# EAGLE board Gr3_interface (EAGLE 9.6.2)
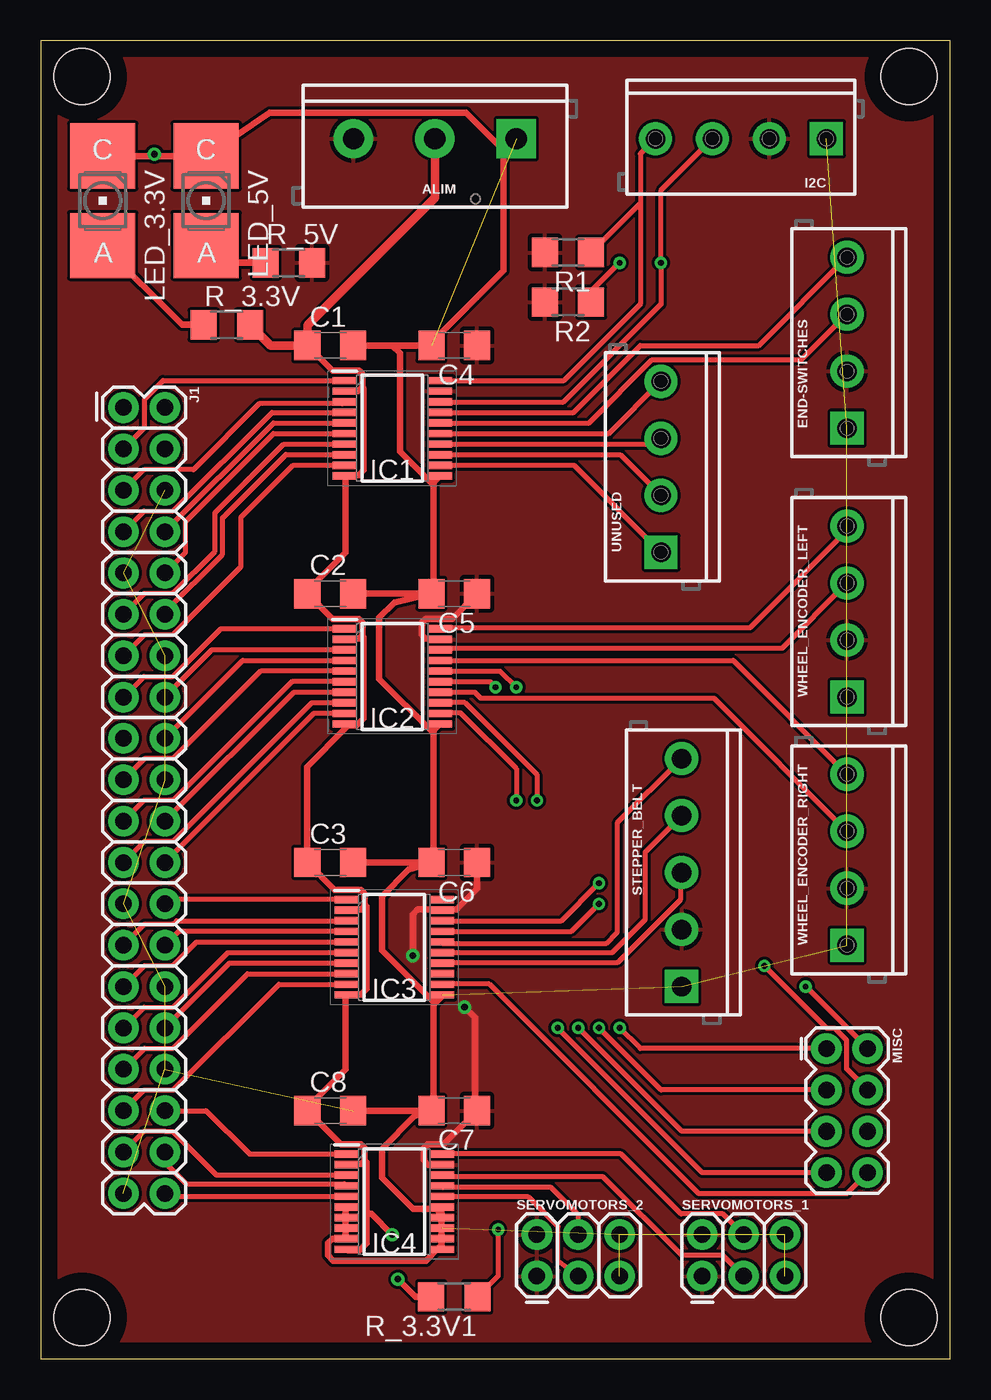
[diagram p0: board, top side]
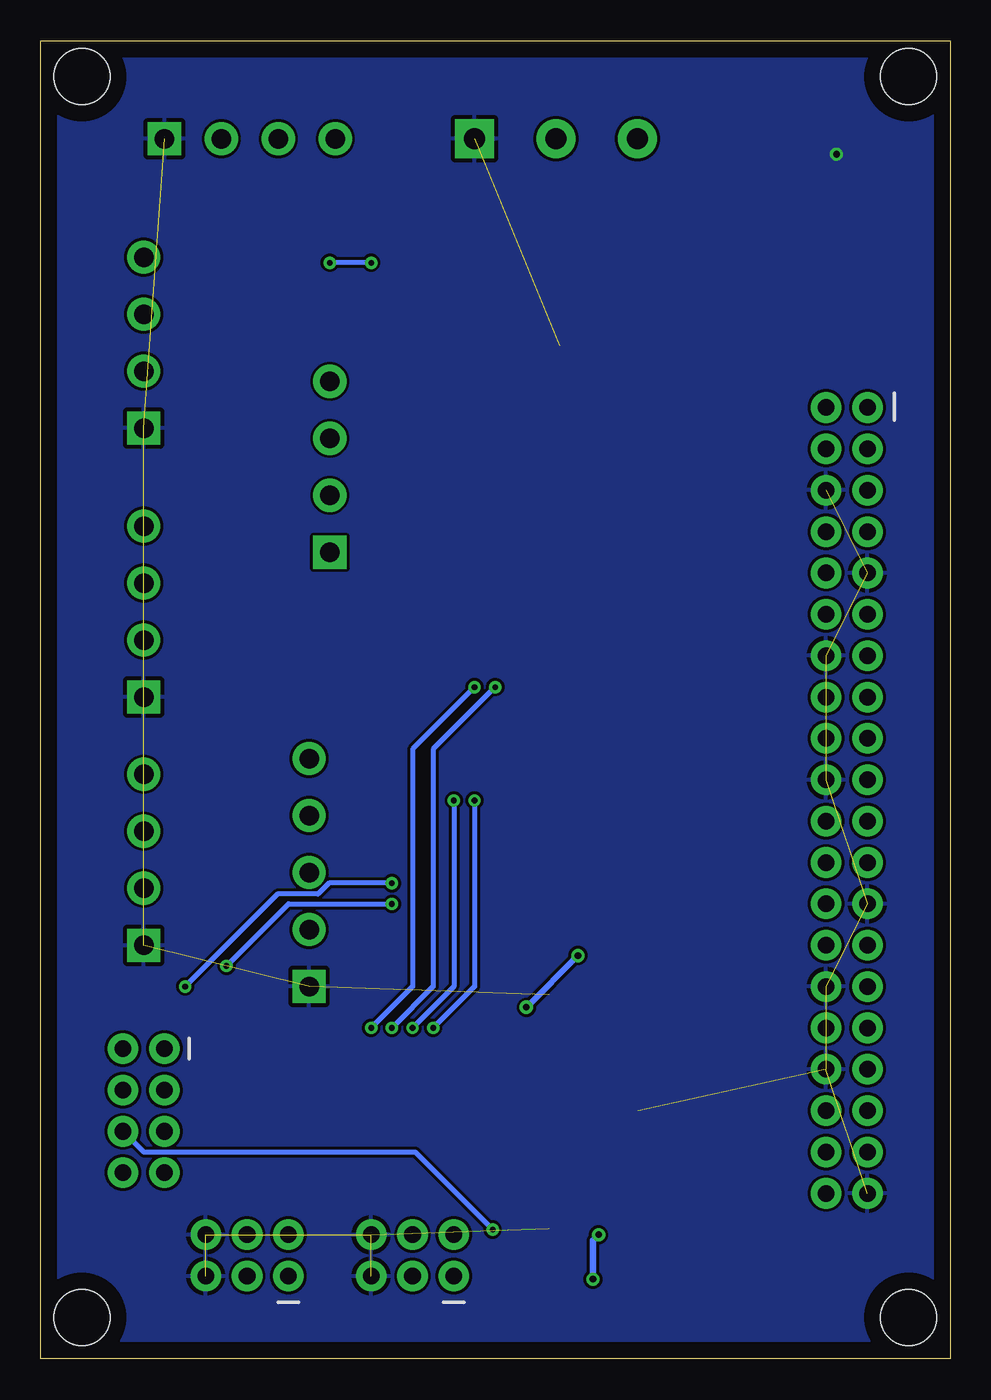
[diagram p1: board, bottom side, seen from below]

Size 55.86 x 80.95 mm. Coordinates in mm from the lower left corner, seen from the top.
Outline: 0,0 55.86,0 55.86,80.95 0,80.95 0,0
Copper layers (1*16): Top 0.035mm / dielectric 1.5mm / Bottom 0.035mm
Design rules "default": minimum track width 6mil, minimum drill 0.35mm, track to track 6mil, track to pad 6mil, pad to pad 6mil, via to via 6mil, smd to smd 6mil, copper to edge 40mil, drill to drill 6mil, minimum pad ring 10mil, minimum via ring 8mil, stop-mask expansion 4mil, vias tented up to drill 0mil, thermal gap 10mil
Net classes: 0 default: width 0.305 mm, drill 0.305 mm, clearance 0.152 mm; 1 Power: width 0.406 mm, drill 0.406 mm, clearance 0.178 mm
Holes 3.43 mm at 53.34,78.74 2.54,78.74 2.54,2.54 53.34,2.54

## Footprints (pad centres in the part's own frame; a part is rotated, then mirrored left to right if it is on the bottom)
SCREWTERMINAL-5MM-3 = drill 1.3 pad 2.413 square: 1 0,0 | drill 1.3 pad 2.413: 2 5,0; 3 10,0
C1206 = smd 1.6 x 1.8: 1 -1.4,0; 2 1.4,0
SCREWTERMINAL-3.5MM-4 = drill 1.2 pad 2.032 square: 1 0,0 | drill 1.2 pad 2.032: 2 3.5,0; 3 7,0; 4 10.5,0
SOP65P640X120-20N = smd 1.475 x 0.45: 1 -2.938,2.925; 2 -2.938,2.275; 3 -2.938,1.625; 4 -2.938,0.975; 5 -2.938,0.325; 6 -2.938,-0.325; 7 -2.938,-0.975; 8 -2.938,-1.625; 9 -2.938,-2.275; 10 -2.938,-2.925; 11 2.938,-2.925; 12 2.938,-2.275; 13 2.938,-1.625; 14 2.938,-0.975; 15 2.938,-0.325; 16 2.938,0.325; 17 2.938,0.975; 18 2.938,1.625; 19 2.938,2.275; 20 2.938,2.925
2X20 = drill 1.016 pad 1.88: 1 0,0; 2 0,2.54; 3 2.54,0; 4 2.54,2.54; 5 5.08,0; 6 5.08,2.54; 7 7.62,0; 8 7.62,2.54; 9 10.16,0; 10 10.16,2.54; 11 12.7,0; 12 12.7,2.54; 13 15.24,0; 14 15.24,2.54; 15 17.78,0; 16 17.78,2.54; 17 20.32,0; 18 20.32,2.54; 19 22.86,0; 20 22.86,2.54; 21 25.4,0; 22 25.4,2.54; 23 27.94,0; 24 27.94,2.54; 25 30.48,0; 26 30.48,2.54; 27 33.02,0; 28 33.02,2.54; 29 35.56,0; 30 35.56,2.54; 31 38.1,0; 32 38.1,2.54; 33 40.64,0; 34 40.64,2.54; 35 43.18,0; 36 43.18,2.54; 37 45.72,0; 38 45.72,2.54; 39 48.26,0; 40 48.26,2.54
P-LCC-2 = smd 4 x 4: A 0,2.75; C 0,-2.75
2X4 = drill 1.016 pad 1.88: 1 -3.81,-1.27; 2 -3.81,1.27; 3 -1.27,-1.27; 4 -1.27,1.27; 5 1.27,-1.27; 6 1.27,1.27; 7 3.81,-1.27; 8 3.81,1.27
R1206 = smd 1.6 x 1.803: 1 -1.422,0; 2 1.422,0
2X3 = drill 1.016 pad 1.88: 1 0,0; 2 0,2.54; 3 2.54,0; 4 2.54,2.54; 5 5.08,0; 6 5.08,2.54
SCREWTERMINAL-3.5MM-5 = drill 1.2 pad 2.032 square: 1 0,0 | drill 1.2 pad 2.032: 2 3.5,0; 3 7,0; 4 10.5,0; 5 14,0

## Placement (x,y rotation side)
ALIM  [SCREWTERMINAL-5MM-3]  29.21,74.93 180 top
C1  0.1uF  [C1206]  17.78,62.23 0 top
C2  0.1uF  [C1206]  17.78,46.99 0 top
C3  0.1uF  [C1206]  17.78,30.48 0 top
C4  0.1uF  [C1206]  25.4,62.23 180 top
C5  0.1uF  [C1206]  25.4,46.99 180 top
C6  0.1uF  [C1206]  25.4,30.48 180 top
C7  0.1uF  [C1206]  25.4,15.24 180 top
C8  0.1uF  [C1206]  17.78,15.24 0 top
END-SWITCHES  [SCREWTERMINAL-3.5MM-4]  49.53,57.15 90 top
I2C  [SCREWTERMINAL-3.5MM-4]  48.26,74.93 180 top
IC1  TXS0108EPWR  [SOP65P640X120-20N]  21.59,57.15 0 top
IC2  TXS0108EPWR  [SOP65P640X120-20N]  21.59,41.91 0 top
IC3  TXS0108EPWR  [SOP65P640X120-20N]  21.72,25.27 0 top
IC4  TXS0108EPWR  [SOP65P640X120-20N]  21.72,9.65 0 top
J1  RASPBERRYPI-40-PIN-GPIO_PTH_NO_SHROUD  [2X20]  5.08,58.42 270 top
LED_3.3V  GREEN  [P-LCC-2]  3.81,71.12 180 top
LED_5V  GREEN  [P-LCC-2]  10.16,71.12 180 top
MISC  [2X4]  49.53,15.24 270 top
R1  10k  [R1206]  32.38,67.94 180 top
R2  10k  [R1206]  32.38,64.9 180 top
R_3.3V  1k  [R1206]  11.43,63.5 0 top
R_3.3V1  1k  [R1206]  25.4,3.81 180 top
R_5V  1k  [R1206]  15.24,67.31 0 top
SERVOMOTORS_1  [2X3]  40.64,5.08 0 top
SERVOMOTORS_2  [2X3]  30.48,5.08 0 top
STEPPER_BELT  [SCREWTERMINAL-3.5MM-5]  39.37,22.86 90 top
UNUSED  [SCREWTERMINAL-3.5MM-4]  38.1,49.53 90 top
WHEEL_ENCODER_LEFT  [SCREWTERMINAL-3.5MM-4]  49.53,40.64 90 top
WHEEL_ENCODER_RIGHT  [SCREWTERMINAL-3.5MM-4]  49.53,25.4 90 top

## Library data of the parts
ALIM = SparkFun-Connectors; PROD_ID: CONN-10134; SF_SKU: PRT-08433
C1-C8 LED_3.3V LED_5V R1 R2 R_3.3V R_3.3V1 R_5V = adafruit
END-SWITCHES I2C UNUSED WHEEL_ENCODER_LEFT WHEEL_ENCODER_RIGHT = SparkFun-Connectors; PROD_ID: 2xCONN-08399; SF_ID: 2xPRT-08084
IC1-IC4 = TXS0108EPWR; ARROW_PART_NUMBER: TXS0108EPWR; ARROW_PRICE-STOCK: https://www.arrow.com/en/products/txs0108epwr/texas-instruments; DESCRIPTION: TXS0108EPWR, Voltage Level Translator, Open Drain 1.2 3.6 V, 1.65 5.5 V 20-Pin TSSOP; HEIGHT: 1.2mm; MANUFACTURER_NAME: Texas Instruments; MANUFACTURER_PART_NUMBER: TXS0108EPWR; MOUSER_PART_NUMBER: 595-TXS0108EPWR; MOUSER_PRICE-STOCK: https://www.mouser.co.uk/ProductDetail/Texas-Instruments/TXS0108EPWR?qs=IUbkBnfnSQLgiWtCbWtYOw%3D%3D
J1 MISC = SparkFun-Connectors
SERVOMOTORS_1 SERVOMOTORS_2 = SparkFun-Connectors; PROD_ID: CONN-09701
STEPPER_BELT = SparkFun-Connectors; PROD_ID: Combine 8288+8399

## Nets
1: J1.1
2: J1.2
3.3V [Power]: ALIM.2 C1.1 C2.1 C3.1 C8.1 IC1.2 IC1.10 IC2.2 IC2.10 IC3.2 IC3.10 IC4.2 IC4.10 R_3.3V1.2 R_3.3V.2
4: J1.4
5V [Power]: ALIM.3 C4.1 C5.1 C6.1 C7.1 END-SWITCHES.2 I2C.2 IC1.19 IC2.19 IC3.19 IC4.19 R1.2 R2.2 R_5V.2 SERVOMOTORS_1.1 SERVOMOTORS_1.2 SERVOMOTORS_2.1 SERVOMOTORS_2.2 STEPPER_BELT.2 WHEEL_ENCODER_LEFT.2 WHEEL_ENCODER_RIGHT.2
17: J1.17
BELT_DIR: IC3.14 STEPPER_BELT.3
BELT_ENABLE: IC3.16 STEPPER_BELT.5
BELT_STEP: IC3.15 STEPPER_BELT.4
CE0: IC2.9 J1.24
CE0-5V: IC2.12 MISC.7
CE1: IC3.1 J1.26
CE1-5V: IC3.20
END-SWITCH_1: END-SWITCHES.4 IC1.17
END-SWITCH_2: END-SWITCHES.3 IC1.16
GND [Power]: ALIM.1 C1.2 C2.2 C3.2 C4.2 C5.2 C6.2 C7.2 C8.2 END-SWITCHES.1 I2C.1 IC1.11 IC2.11 IC3.11 IC4.6 IC4.7 IC4.8 IC4.9 IC4.11 IC4.12 IC4.13 IC4.14 IC4.15 J1.6 J1.9 J1.14 J1.20 J1.25 J1.30 J1.34 J1.39 LED_3.3V.C LED_5V.C SERVOMOTORS_1.5 SERVOMOTORS_1.6 SERVOMOTORS_2.5 SERVOMOTORS_2.6 STEPPER_BELT.1 WHEEL_ENCODER_LEFT.1 WHEEL_ENCODER_RIGHT.1
GP4: IC1.4 J1.7
GP5: IC3.5 J1.29
GP6: IC3.6 J1.31
GP12: IC3.7 J1.32
GP13: IC3.8 J1.33
GP16: IC4.1 J1.36
GP17: IC1.7 J1.11
GP18: IC1.8 J1.12
GP19: IC3.9 J1.35
GP20: IC4.4 J1.38
GP21: IC4.5 J1.40
GP22: IC2.1 J1.15
GP23: IC2.3 J1.16
GP24: IC2.4 J1.18
GP25: IC2.7 J1.22
GP26: IC4.3 J1.37
GP27: IC1.9 J1.13
ID_SC: IC3.4 J1.28
ID_SC-5V: IC3.17 MISC.4
ID_SD: IC3.3 J1.27
ID_SD-5V: IC3.18 MISC.2
INFRARED_SENSING: IC3.12 MISC.8
INFRARED_SUPPLY: MISC.6 R_3.3V1.1
MISO: IC2.6 J1.21
MISO-5V: IC2.15 MISC.3
MOSI: IC2.5 J1.19
MOSI-5V: IC2.16 MISC.1
N$1: IC3.13
N$5: LED_3.3V.A R_3.3V.1
N$6: LED_5V.A R_5V.1
RXI: IC1.6 J1.10
SCL: IC1.3 J1.5
SCL-5V: I2C.3 IC1.18 R2.1
SCLK: IC2.8 J1.23
SCLK-5V: IC2.13 MISC.5
SDA: IC1.1 J1.3
SDA-5V: I2C.4 IC1.20 R1.1
SERVO_BACK: IC4.20 SERVOMOTORS_1.4
SERVO_CLAMP: IC4.17 SERVOMOTORS_2.4
SERVO_FLAG: IC4.16 SERVOMOTORS_2.3
SERVO_RACK: IC4.18 SERVOMOTORS_1.3
TXO: IC1.5 J1.8
UNUSED_1: IC1.15 UNUSED.4
UNUSED_2: IC1.14 UNUSED.3
UNUSED_3: IC1.13 UNUSED.2
UNUSED_4: IC1.12 UNUSED.1
W_LEFT_A: IC2.20 WHEEL_ENCODER_LEFT.4
W_LEFT_B: IC2.18 WHEEL_ENCODER_LEFT.3
W_RIGHT_A: IC2.17 WHEEL_ENCODER_RIGHT.4
W_RIGHT_B: IC2.14 WHEEL_ENCODER_RIGHT.3

## Tracks (layer width: path | path; a pad name or v marks a point on that pad's centre or on a via)
3.3V  (via drill 0.41)
  Top 0.406: 19.77,59.69 19.5,59.42 IC1.2 | 19.73,44.41 19.77,44.45 19.77,45.22 19.55,45.44 17.93,45.44 C2.1 16.35,47.15 18.73,49.53 18.73,54.13 | 19.73,44.41 19.55,44.23 18.7,44.23 IC2.2 | 19.9,27.82 19.9,28.58 19.67,28.8 18.06,28.8 C3.1 16.35,30.64 16.35,36.35 18.73,38.73 18.73,38.89 | 19.9,27.82 19.67,27.59 18.82,27.59 IC3.2 | 19.89,12.18 19.9,12.19 19.9,12.96 19.67,13.18 18.44,13.18 C8.1 16.35,15.4 18.73,17.78 18.73,22.23 IC3.10 18.89,22.38 19.67,22.38 20,22.72 20,27.78 19.9,27.82 | 19.89,12.18 19.67,11.97 18.82,11.97 IC4.2 | 19.77,59.69 19.77,60.46 19.55,60.68 17.93,60.68 C1.1 | 18.73,38.89 IC2.10 | 19.73,44.41 19.84,44.29 19.84,39.33 19.41,38.89 18.73,38.89 | 18.73,54.13 IC1.10 | 19.77,59.69 19.84,59.53 19.84,54.56 19.55,54.27 18.87,54.27 18.73,54.13 | 20,8.89 20,12.06 19.89,12.18 | IC4.10 18.89,6.67 19.57,6.67 20,7.1 20,8.89 | R_3.3V1.2 23.02,3.81 v21.94,4.89 | 20,8.89 20.32,8.89 v21.59,7.62
  Top 0.508: ALIM.2 24.21,71.31 16.38,63.48 C1.1 14.12,62.23 R_3.3V.2
  Bottom 0.406: v21.59,7.62 21.94,7.27 v21.94,4.89
5V  (via drill 0.41)
  Top 0.406: C5.1 25.25,45.44 23.63,45.44 23.41,45.22 23.41,44.45 23.63,44.23 24.48,44.23 IC2.19 | v22.86,24.77 22.86,27.3 23.15,27.59 24.61,27.59 IC3.19 24.7,27.59 25.55,27.59 26.8,28.84 C6.1 | v26.04,21.59 26.67,20.95 26.67,15.24 C7.1 24.74,13.18 23.76,13.18 23.54,12.96 23.54,12.19 23.8,11.93 IC4.19
  Bottom 0.406: v26.04,21.59 v22.86,24.77
  pour Top: -1.27,82.55 57.15,82.55 57.15,-1.27 -1.27,-1.27
BELT_DIR
  Top 0.305: IC3.14 24.69,24.35 35.45,24.35 39.32,28.21 39.32,29.83 STEPPER_BELT.3
BELT_ENABLE
  Top 0.305: IC3.16 24.69,25.49 34.71,25.49 35.41,26.19 35.41,32.89 39.32,36.8 STEPPER_BELT.5
BELT_STEP
  Top 0.305: IC3.15 35.11,24.95 37.13,26.98 37.13,31.12 STEPPER_BELT.4
CE0
  Top 0.305: IC2.9 16.77,39.63 J1.24
CE0-5V  (via drill 0.35)
  Top 0.305: MISC.7 40.64,11.43 v31.75,20.32 | v29.21,34.29 29.21,36.24 25.78,39.67 24.56,39.67 IC2.12
  Bottom 0.305: v31.75,20.32 29.21,22.86 v29.21,34.29
CE1
  Top 0.305: IC3.1 7.88,28.2 J1.26
END-SWITCH_1
  Top 0.305: IC1.17 32.73,58.12 36.83,62.23 44.11,62.23 END-SWITCHES.4
END-SWITCH_2
  Top 0.305: IC1.16 33.68,57.48 37.55,61.35 46.73,61.35 END-SWITCHES.3
GND  (via drill 0.41)  (18 unrouted)
  Top 0.406: LED_3.3V.C 6.99,73.87 | 6.99,73.87 LED_5V.C 14.07,76.52 26.14,76.52 28.42,74.24 28.42,66.83 23.97,62.39 C4.2 21.59,62.23 | 24.61,9.05 24.61,8.73 IC4.14 24.61,8.57 24.61,8.1 IC4.13 24.61,7.94 24.61,7.46 IC4.12 24.61,7.3 24.61,6.83 IC4.11 24.45,6.83 23.65,6.03 17.97,6.03 17.66,6.34 17.66,7.11 17.93,7.38 IC4.9 18.73,7.46 18.73,7.94 IC4.8 18.73,8.1 18.73,8.57 IC4.7 18.73,8.73 18.73,9.37 IC4.6 | 24.21,21.83 24.13,21.75 24.13,15.24 C7.2 | 24.21,21.83 24.61,22.23 IC3.11 | C7.2 C8.2 | C7.2 22.96,14.91 20.95,12.91 20.95,11.11 22.86,9.21 24.45,9.21 24.45,9.05 24.61,9.05 | 24.13,38.58 24.45,38.89 IC2.11 | 24.13,38.58 24.13,30.48 C6.2 | C6.2 C3.2 | v6.99,73.98 6.99,73.87 | 21.59,62.23 C1.2 | 24.13,53.82 24.45,54.13 IC1.11 | 24.13,53.82 24.13,46.99 C5.2 | C5.2 C2.2 | 24.13,53.82 23.97,53.82 22.07,55.72 22.07,61.75 21.59,62.23 | 24.13,38.58 23.97,38.58 20.8,41.75 20.8,45.52 21.72,46.45 C5.2 | 24.21,21.83 20.95,25.08 20.95,28.39 22.6,30.04 C6.2 | IC4.15 24.61,9.37 24.61,9.05
  pour Bottom: -2.54,83.82 58.42,83.82 58.42,-2.54 -2.54,-2.54
GP4
  Top 0.305: J1.7 6.35,52.07 8.15,52.07 14.2,58.12 IC1.4
GP5
  Top 0.305: J1.29 6.38,24.16 8.14,24.16 9.58,25.6 IC3.5
GP6
  Top 0.305: J1.31 6.35,21.59 8.15,21.59 11.5,24.95 IC3.6
GP12
  Top 0.305: J1.32 11.6,24.3 IC3.7
GP13
  Top 0.305: J1.33 6.38,19.07 8.14,19.07 12.71,23.65 IC3.8
GP16
  Top 0.305: J1.36 10.16,15.24 12.82,12.58 IC4.1
GP17
  Top 0.305: J1.11 6.38,47.02 8.14,47.02 10.71,49.59 10.71,51.96 14.92,56.17 IC1.7
GP18
  Top 0.305: J1.12 7.62,45.85 11.17,49.4 11.17,51.65 15.07,55.55 18.63,55.55 IC1.8
GP19
  Top 0.305: J1.35 6.35,16.51 8.15,16.51 14.63,23 IC3.9
GP20
  Top 0.305: IC4.4 18.66,10.75 8.93,10.75 7.62,12.05 J1.38
GP21
  Top 0.305: J1.40 7.8,9.98 IC4.5
GP22
  Top 0.305: J1.15 6.35,41.91 8.15,41.91 11.07,44.84 IC2.1
GP23
  Top 0.305: IC2.3 10.52,43.53 J1.16
GP24
  Top 0.305: J1.18 12.4,42.88 IC2.4
GP25
  Top 0.305: IC2.7 15.54,40.94 J1.22
GP26
  Top 0.305: IC4.3 10.8,11.28 8.14,13.95 7.64,13.95 7.62,13.97 6.35,13.97 J1.37
GP27
  Top 0.305: J1.13 6.38,44.48 8.14,44.48 12.31,48.65 12.31,51.68 15.51,54.88 IC1.9
ID_SC
  Top 0.305: IC3.4 8.47,26.25 J1.28
ID_SC-5V  (via drill 0.35)
  Top 0.305: IC3.17 32.6,26.25 v34.29,27.94 | MISC.4 49.51,17.8 49.51,19.57 48.78,20.3 48.28,20.3 v44.45,24.13
  Bottom 0.305: v44.45,24.13 40.64,27.94 v34.29,27.94
ID_SD
  Top 0.305: IC3.3 8.34,26.9 8.14,26.7 6.38,26.7 J1.27
ID_SD-5V  (via drill 0.35)
  Top 0.305: IC3.18 31.98,26.9 v34.29,29.21 | MISC.2 v46.99,22.86
  Bottom 0.305: v34.29,29.21 38.15,29.21 38.82,28.54 41.31,28.54 v46.99,22.86
INFRARED_SENSING
  Top 0.305: IC3.12 24.77,23.02 27.55,23.02 40.41,10.16 49.53,10.16 MISC.8
INFRARED_SUPPLY  (via drill 0.35)
  Top 0.305: v28.1,7.94 28.1,5.09 R_3.3V1.1
  Bottom 0.305: v28.1,7.94 32.86,12.7 49.53,12.7 MISC.6
MISO
  Top 0.305: J1.21 6.35,34.29 8.15,34.29 15.44,41.59 IC2.6
MISO-5V  (via drill 0.35)
  Top 0.305: IC2.15 27.6,41.59 v27.94,41.25 | MISC.3 38.1,16.51 v34.29,20.32
  Bottom 0.305: v27.94,41.25 31.75,37.44 31.75,22.86 v34.29,20.32
MOSI
  Top 0.305: J1.19 6.38,36.85 8.14,36.85 13.52,42.23 IC2.5
MOSI-5V  (via drill 0.35)
  Top 0.305: IC2.16 28.22,42.23 v29.21,41.25 | MISC.1 36.83,19.05 v35.56,20.32
  Bottom 0.305: v29.21,41.25 33.02,37.44 33.02,22.86 v35.56,20.32
N$5
  Top 0.406: LED_3.3V.A 8.68,63.5 R_3.3V.1
N$6
  Top 0.406: R_5V.1 11.22,67.31 LED_5V.A
RXI
  Top 0.305: J1.10 8.89,49.53 8.89,51.42 14.29,56.83 IC1.6
SCL
  Top 0.305: J1.5 6.35,54.61 9.38,54.61 13.43,58.66 18.53,58.66 IC1.3
SCL-5V  (via drill 0.35)
  Top 0.305: IC1.18 24.77,58.74 32.07,58.74 38.1,64.77 v38.1,67.31 38.1,71.77 I2C.3 | R2.1 33.81,65.56 v35.56,67.31
  Bottom 0.305: v35.56,67.31 v38.1,67.31
SCLK
  Top 0.305: J1.23 6.38,31.77 8.14,31.77 16.64,40.28 IC2.8
SCLK-5V  (via drill 0.35)
  Top 0.305: IC2.13 24.54,40.29 26.06,40.29 30.48,35.87 v30.48,34.29 | MISC.5 39.37,13.97 v33.02,20.32
  Bottom 0.305: v33.02,20.32 30.48,22.86 v30.48,34.29
SDA
  Top 0.305: J1.3 6.38,57.17 6.38,58.94 7.51,60.08 IC1.1
SDA-5V
  Top 0.305: I2C.4 36.83,74 36.83,70.97 | 36.83,70.97 36.83,64.76 32.15,60.08 IC1.20 | R1.1 36.83,70.97
SERVO_BACK
  Top 0.305: IC4.20 24.69,12.57 35.65,12.57 39.33,8.89 41.91,8.89 SERVOMOTORS_1.4
SERVO_CLAMP
  Top 0.305: SERVOMOTORS_2.4 33.02,8.84 31.34,10.52 24.69,10.52 IC4.17
SERVO_FLAG
  Top 0.305: IC4.16 24.69,9.94 29.96,9.94 31.77,8.13 31.77,6.01 SERVOMOTORS_2.3
SERVO_RACK
  Top 0.305: IC4.18 24.69,11.2 34.52,11.2 39.37,6.35 41.91,6.35 SERVOMOTORS_1.3
TXO
  Top 0.305: J1.8 14.29,57.48 IC1.5
UNUSED_1
  Top 0.305: IC1.15 34.9,56.83 UNUSED.4
UNUSED_2
  Top 0.305: IC1.14 37.74,56.17 UNUSED.3
UNUSED_3
  Top 0.305: IC1.13 35.6,55.52 UNUSED.2
UNUSED_4
  Top 0.305: IC1.12 32.76,54.88 UNUSED.1
W_LEFT_A
  Top 0.305: IC2.20 24.6,44.91 43.59,44.91 49.53,50.85 WHEEL_ENCODER_LEFT.4
W_LEFT_B
  Top 0.305: IC2.18 24.62,43.63 45.52,43.63 WHEEL_ENCODER_LEFT.3
W_RIGHT_A
  Top 0.305: IC2.17 42.55,42.88 WHEEL_ENCODER_RIGHT.4
W_RIGHT_B
  Top 0.305: WHEEL_ENCODER_RIGHT.3 41.37,40.56 27.04,40.56 26.67,40.94 IC2.14